# Altium PCB ALT-AVR-TESTER-MINI.PcbDoc
Units mm, origin at the board's own origin, x right, y up, seen from the top; angles counter-clockwise.
Board outline 79.88 x 35.94 mm, 3 copper layers (Top Layer, WIRES LAYER, Bottom Layer); 37 components, 35 nets, 126 pads, 12 vias.
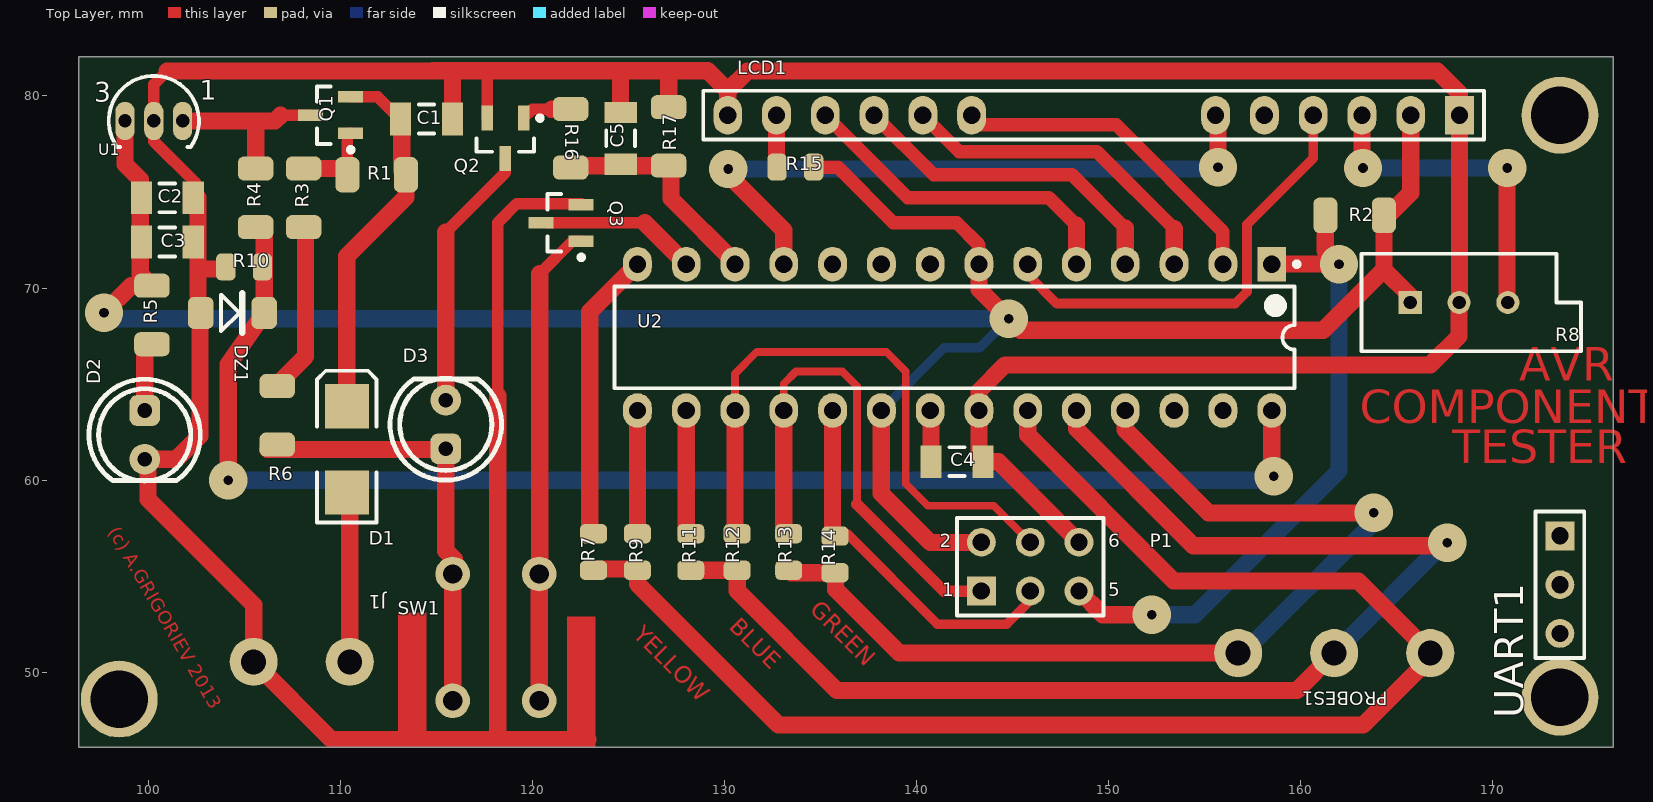
[diagram p0: Top Layer view]
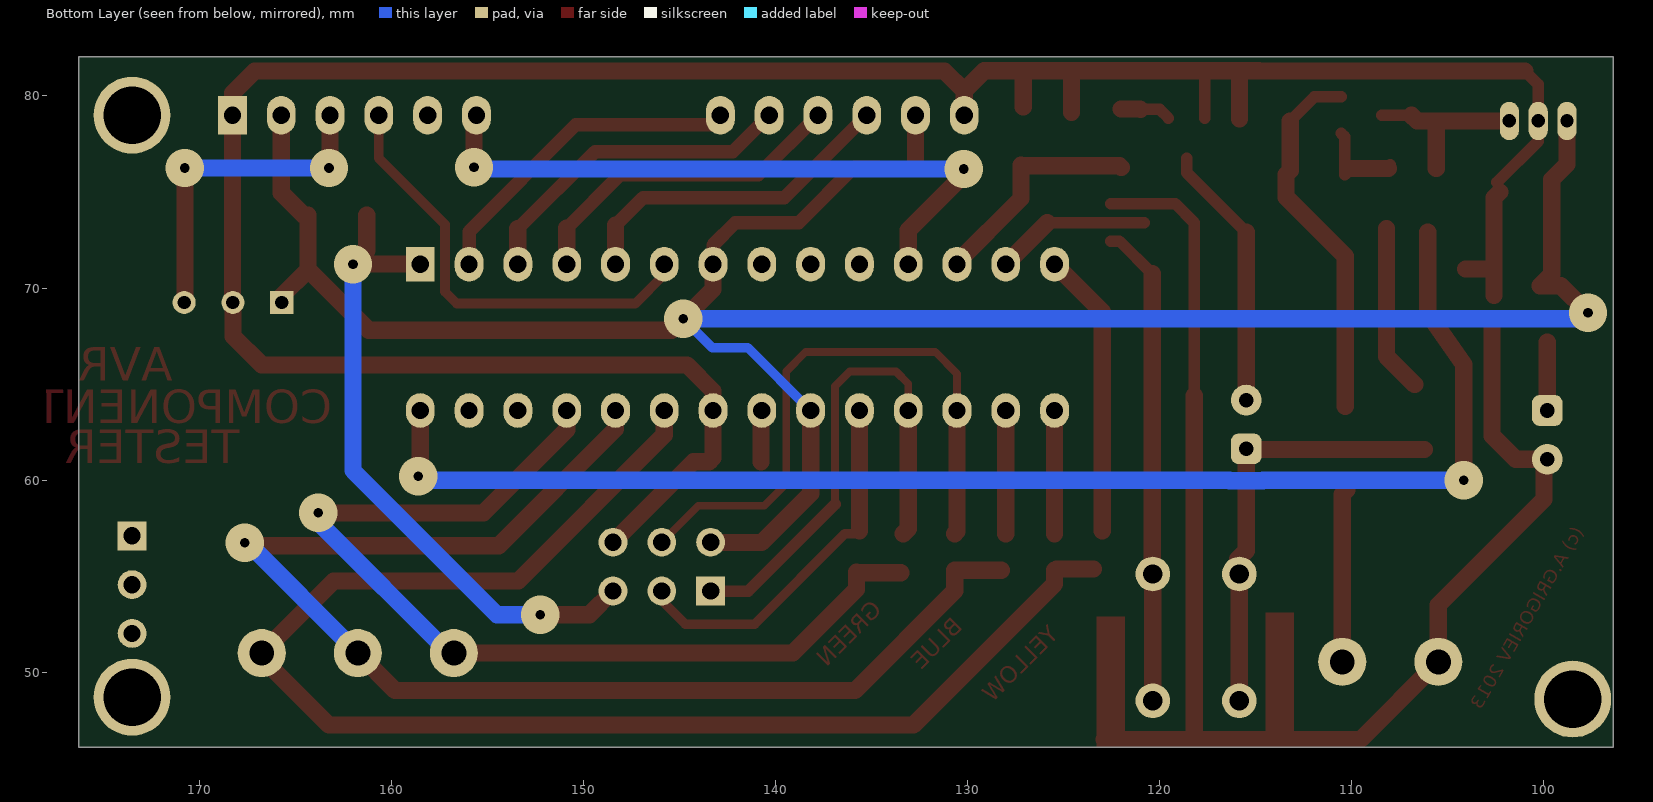
[diagram p1: Bottom Layer view, seen from below]
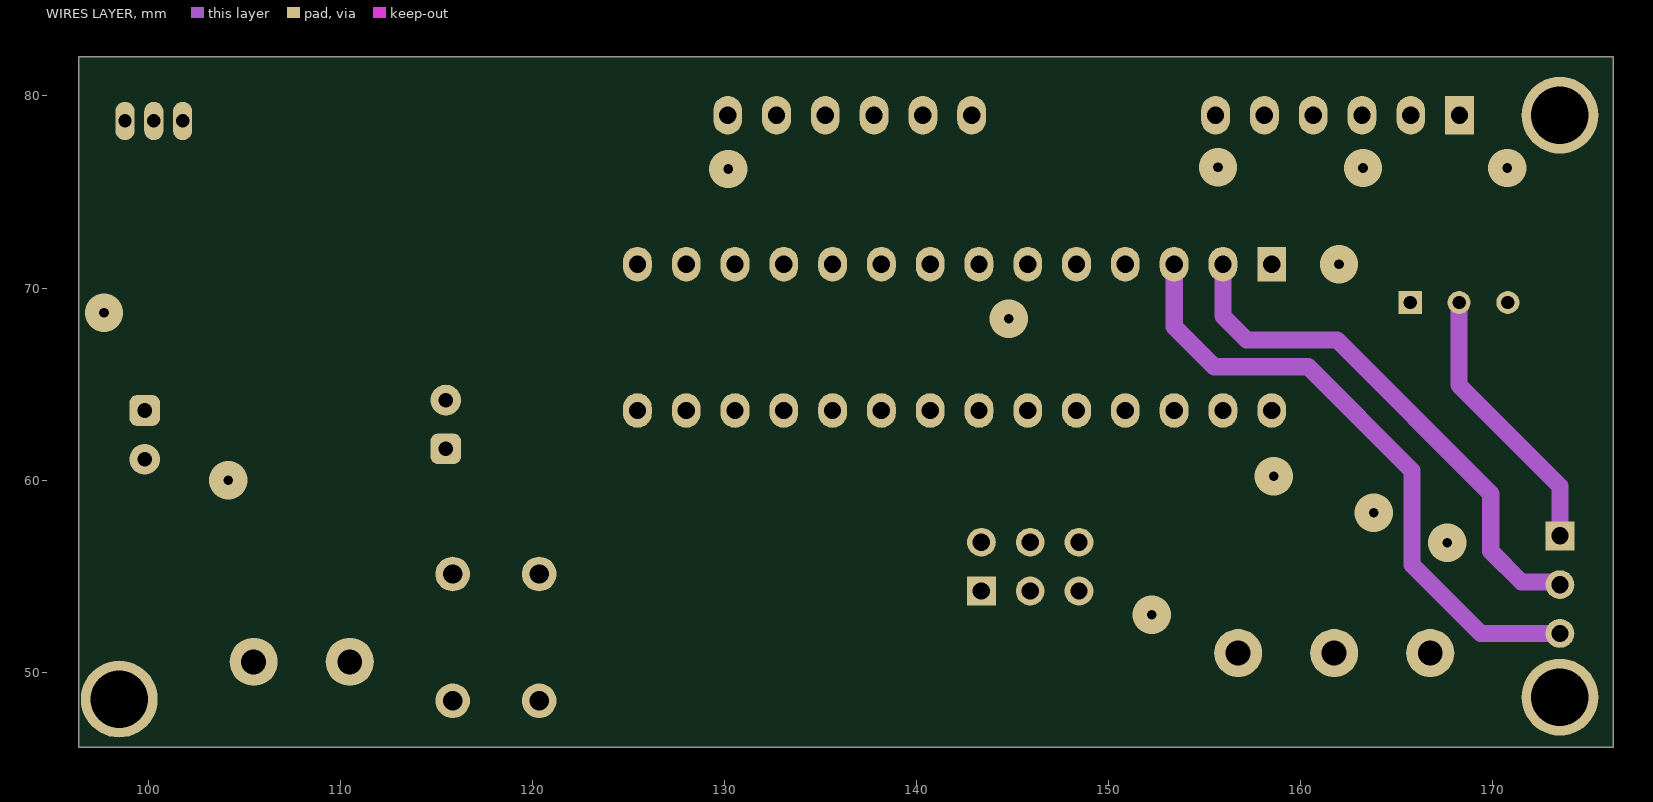
[diagram p2: WIRES LAYER]

## Layer stack, top to bottom
Top Layer: signal copper 0.0356
Dielectric: prepreg 0.32, FR-4, Dk 4.8
WIRES LAYER: signal copper 0.0356
Dielectric: core 0.32, FR-4, Dk 4.8
Bottom Layer: signal copper 0.0356

## Board outline
96.393,82.042 176.276,82.042 176.276,46.101 96.393,46.101 96.393,82.042

## Design rules (kind name [scope] priority, off if disabled: settings)
Clearance Clearance_Polygon [InPolygon] p1: gap=1.2
Clearance [All] p2: gap=0.254
HoleSize [All] p1: absolutevalues=TRUE maxlimit=4 minlimit=0.025 maxpercent=80.000 minpercent=20.000
PolygonConnect [All] p1: connectstyle=Relief reliefconductorwidth=0.254 reliefentries=4 polygonreliefangle="90 Angle" airgapwidth=0.254
RoutingVias [All] p1: holewidth=0.711 width=1.27 viastyle="Through Hole" minholewidth=0.5 minwidth=1.27 maxholewidth=0.711 maxwidth=3
SMDNeckDown [All] p1: percent=120.000
SilkToSilkClearance SilkToSilkClearance_TEXT [IsText] p1: silktosilkclearance=0.001
SilkToSilkClearance [All] p2: silktosilkclearance=0.125
SilkscreenOverComponentPads SilkscreenOverComponentPads_txt [IsText] p1: minsilkscreentomaskgap=-5
SilkscreenOverComponentPads [All] p2: minsilkscreentomaskgap=0.12
SolderMaskExpansion [All] p1: expansion=0.102
Width [All] p1: maxlimit=0.9 minlimit=0.4 preferedwidth=0.7
25 further rules are at their usual default settings.

## Components (designator, comment, footprint, x,y, rotation, side; value= is the part's Value field where it differs from the comment)
C1 "100nF" C1206 114.5,78.8 r180 top
C2 "100nF" C1206 101,74.7 r180 top
C3 "100nF" C1206 101,72.4 r180 top
C4 "100nF" C1206 142.113,60.96 r180 top
C5 "100nF" C1206 124.6,77.8 r270 top
D1 "D Schottky" SMB 110.35,61.6 r90 top
D2 "PWR LED" LED_254 99.822,62.357 r270 top
D3 "LED" LED_254 115.5,62.9 r90 top
DZ1 "BZV55C5V1" SOD80D 104.394,68.707 r270 top
J1 "POWER9V" TB2-5MM 108,50.546 r0 top
LCD1 "HD44780" HDR1X16 168.275,79 r180 top
P1 "ISP" HDR2X3 143.383,54.229 r0 top
PROBES1 "PROBES" TB3-5MM 161.75,51 r0 top
Q1 "MMBT3906" SOT23_N 109.5,79 r180 top
Q2 "PMBT3904" SOT23_N 118.6,77.8 r270 top
Q3 "PMBT3904" SOT23_N 121.5,73.4 r180 top
R1 "ERQF06" RC1206D 111.9,75.9 r270 top
R2 "ERQF06" RC1206D 162.814,73.787 r90 top
R3 "ERQF06" RC1206D 108.1,74.7 r0 top
R4 "10K" RC1206D 105.6,74.7 r180 top
R5 "ERQF06" RC1206D 100.2,68.6 r0 top
R6 "ERQF06" RC1206D 106.725,63.375 r0 top
R7 "750" R0805 123.19,56.261 r180 top
R8 "RPot" VR5 168.25,69.25 r0 top
R9 "500K" R0805 125.476,56.261 r180 top
R10 "3K3" R0805 105,71.1 r90 top
R11 "750" R0805 128.255,56.26 r180 top
R12 "500K" R0805 130.668,56.26 r180 top
R13 "750" R0805 133.35,56.261 r180 top
R14 "500K" R0805 135.763,56.134 r180 top
R15 "150" R0805 133.7,76.3 r90 top
R16 "ERQF06" RC1206D 122,77.8 r180 top
R17 "ERQF06" RC1206D 127.1,77.9 r180 top
SW1 "TP1101" "SW TP1101" 118.11,51.816 r90 top
U1 "µA7805CKC" TO-92 100.3,78.7 r270 top
U2 "ATmega328P-PU" 28P3 141.986,67.437 r270 top locked
UART1 "Header 3" HDR1X3 173.5,57.1 r270 top

## Footprints (in the part's own frame and the unit in brackets; to place one, negate y for a bottom-side part, rotate by r counter-clockwise, add the part's x,y. Pads: shape width x height; smd on the part's side, far side on the other; paste and mask are expansions set on the pad)
28P3 [mm] "DIP, 28-Leads, Row Spacing 7.62mm, Pitch 2.54mm, Body 34.67x7.3mm"
  rect 1.8x1.5 hole 0.9: 1(-3.81,16.51)
  oval 1.8x1.5 hole 0.9: 2(-3.81,13.97) 3(-3.81,11.43) 4(-3.81,8.89) 5(-3.81,6.35) 6(-3.81,3.81) 7(-3.81,1.27) 8(-3.81,-1.27) 9(-3.81,-3.81) 10(-3.81,-6.35) 11(-3.81,-8.89) 12(-3.81,-11.43) 13(-3.81,-13.97) 14(-3.81,-16.51) 15(3.81,-16.51) 16(3.81,-13.97) 17(3.81,-11.43) 18(3.81,-8.89) 19(3.81,-6.35) 20(3.81,-3.81) 21(3.81,-1.27) 22(3.81,1.27) 23(3.81,3.81) 24(3.81,6.35) 25(3.81,8.89) 26(3.81,11.43) 27(3.81,13.97) 28(3.81,16.51)
  silkscreen extent -3.93,-17.7 2.65,17.94, body extent -3.6,-17.65 3.6,17.65, height 4.58
C1206 [mm] "Chip Capacitor, Body 3.2x1.6mm, IPC High Density"
  rect 1.1x1.7 smd: 1(-1.35,0) 2(1.35,0)
  silkscreen extent -0.4,-0.75 0.4,0.75, body extent -1.7,-0.9 1.7,0.9, height 1.3
HDR1X3 [mm] "Connector; Header; 3 Position"
  rect 1.5x1.5 hole 0.9: 1(0,0)
  round 1.5 hole 0.9: 2(2.54,0) 3(5.08,0)
  silkscreen extent -1.27,-1.27 6.35,1.27
HDR1X16 [mm] "Connector; Header; 16 Position"
  rect 1.5x2 hole 0.9: 1(0,0)
  oval 1.5x2 hole 0.9: 2(2.54,0) 3(5.08,0) 4(7.62,0) 5(10.16,0) 6(12.7,0) 11(25.4,0) 12(27.94,0) 13(30.48,0) 14(33.02,0) 15(35.56,0) 16(38.1,0)
  silkscreen extent -1.27,-1.27 39.37,1.27
HDR2X3 [mm] "Connector; Header; 3x2 Position"
  rect 1.5x1.5 hole 0.9: 1(0,0)
  round 1.5 hole 0.9: 2(0,2.54) 3(2.54,0) 4(2.54,2.54) 5(5.08,0) 6(5.08,2.54)
  silkscreen extent -1.27,-1.27 6.35,3.81
LED_254 [mm]
  rrect50% 1.6x1.6 hole 0.762: 1(-1.27,0)
  round 1.6 hole 0.762: 2(1.27,0)
  silkscreen extent -2.9,-2.9 2.4,2.9
R0805 [mm]
  rrect50% 1.4x1 smd: 1(0,-0.953) 2(0,0.953)
  body extent -0.65,-1.1 0.65,1.1, height 0.6
RC1206D [mm]
  rrect50% 1.84x1.25 smd: 1(0,-1.524) 2(0,1.524)
  body extent -0.8,-1.6 0.8,1.6, height 0.5
SMB [mm] "DO-214-AA/SMB; 2 C-Bend Leads; Body 5.3 x 3.6 mm, inc. leads (LxW)"
  rect 2.3x2.3 smd: 1(-2.25,0) 2(2.25,0)
  silkscreen extent -3.8,-1.55 4.1,1.55
SOD80D [mm]
  rrect50% 1.68x1.34 smd: 1(0,-1.651) 2(0,1.651)
  silkscreen extent -1.02,-0.59 1.02,0.51, body extent -0.8,-1.75 0.8,1.75, height 1.6
SOT23_N [mm] "SOT23, 3-Leads, Body 2.9x1.3mm, Pitch 0.95mm, Lead Span 2.3mm, IPC Medium Density"
  rect 1.3x0.6 smd: 1(-1.05,0.95) 2(-1.05,-0.95) 3(1.05,0)
  silkscreen extent -1.18,-1.5 0.7,1.92, body extent -0.7,-1.5 0.7,1.5, height 1.1
"SW TP1101" [mm]
  round 1.8 hole 1: 1(-3.3,2.25) 2(-3.3,-2.25) 3(3.3,2.25) 4(3.3,-2.25)
  body extent -3.4,-3 3.4,3, height 4.3
TB2-5MM [mm]
  round 2.5 hole 1.3: 1(-2.5,0) 2(2.5,0)
  body extent -4.99,-3.3 4.99,4.2, height 10
TB3-5MM [mm]
  round 2.5 hole 1.3: 1(-5,0) 2(0,0) 3(5,0)
  body extent -7.49,-3.3 7.49,4.2, height 10
TO-92 [mm] "TO, Flat Index; 3 In-Line, Axial Leads; Body Dia. 4.6mm; Leads 0.41 x 0.39 mm (max)"
  oval 2x1 hole 0.7: 1(0,1.5) 2(0,0) 3(0,-1.5)
  silkscreen extent -2.34,-2.34 1.35,2.34
VR5 [mm] "Thru-Hole; 3 Leads"
  rect 1.2x1.2 hole 0.7: 1(-2.54,0)
  round 1.2 hole 0.7: 2(0,0) 3(2.54,0)
  silkscreen extent -5.08,-2.54 6.35,2.54

## Part data
C1 C2 C3 C4 C5: library part "CAP 0805 NP0", "SMD Конденсатор 0805 NP0 25V"
D1: "Schottky Diode"
D2: library part LED
DZ1: library part "DZ BZV55C5V1", "SMD SILICON ZENER DIODE 0.5 WATT ± 5% TOLERANCE"
J1: library part CON2
LCD1: library part MHDR1X16, "Header, 16-Pin"
P1: library part "Header 3X2H", "Header, 3-Pin, Dual row, Right Angle"
PROBES1: library part "CON TBN050-D10-03", "Клемник на плату прямой шаг5мм"
Q1: "PNP Switching Transistor"
Q2 Q3: "NPN Switching Transistor"
R1 R2 R3 R5 R6 R16 R17: "Flat Chip Fuse Resistor, 0.47 Ohm to 10 Ohm Range, 5% Tolerance, 0805 Size, 0.1 W"
R4 R7 R9 R10 R11 R12 R13 R14 R15: library part "RES 0805", "SMD Резистор 0805"
R8: "Potentiometer"
SW1: library part "SW TP1101", "Кнопка"
U1: "Positive-Voltage Regulator"
U2: "8-bit AVR Microcontroller, 32KB Flash, 1KB EEPROM, 2KB SRAM, 28-pin PDIP, Industrial Grade (-40°C to 85°C)"
UART1: "Header, 3-Pin"

## Free pads (board coordinates)
  round 4 hole 3: 0(98.5,48.6) 0(173.5,48.7) 0(173.5,79)

## Via types
v1: diameter 2, hole 0.5, Top Layer to Bottom Layer, 12 vias

## Nets (pads, with @x,y where several pads share a name; then routed paths per layer and width w, separated by ;. In a path a pad name is that pad's centre, name@x,y a point inside that pad or via, vN(x,y) a via of type N, cw(c..) or ccw(c..) an arc to the next point about the centre after c; other vN are vias at no path point)
BATTERY_PIN: DZ1.2 R4.2 R10.1 U2.28 | length 71.1
  Top Layer w0.9: v1(104.175,60) 104.175,66.025 DZ1.2 R4.2@106.045,72.9 ; v1@158.496,60.304 U2.28
  Bottom Layer w0.9: v1(104.175,60) 114.619,60 114.643,59.976 116.357,59.976 116.381,60 v1@158.4,60
  other v1: 158.6,60.2
BLUE_PROBES: PROBES1.2 R11.2 R12.2 U2.24 | length 68.8
  Top Layer w0.9: R11.2 R12.2 130.668,54.244 135.866,49.046 159.796,49.046 PROBES1.2 ; U2.24 148.336,62.664 154.408,56.592 167.482,56.592 v1(167.64,56.75)
  Bottom Layer w0.9: PROBES1.2 167.64,56.89 v1(167.64,56.75)
D4: LCD1.11 U2.2 UART1.2 | length 45.1
  Top Layer w0.7: LCD1.11 143.375,78.5 150.4,78.5 155.956,72.944 U2.2
  WIRES LAYER w0.9: U2.2 155.956,68.544 157.2,67.3 161.9,67.3 169.9,59.3 169.9,56.3 171.5,54.7 173.36,54.7 UART1.2
D5: LCD1.12 U2.3 UART1.3 | length 50.2
  Top Layer w0.7: LCD1.12 142.235,77.1 149.4,77.1 153.416,73.084
  Top Layer w0.9: U2.3 153.416,73.084
  WIRES LAYER w0.9: U2.3 153.416,67.984 155.5,65.9 160.4,65.9 165.8,60.5 165.8,55.6 169.38,52.02 UART1.3
D6: LCD1.13 U2.4 | length 17.4
  Top Layer w0.7: LCD1.13 140.895,75.9 148.1,75.9 150.876,73.124
  Top Layer w0.9: U2.4 150.876,73.124
D7: LCD1.14 U2.5 | length 17.5
  Top Layer w0.7: LCD1.14 139.555,74.7 146.9,74.7 148.336,73.264
  Top Layer w0.9: U2.5 148.336,73.264
E: LCD1.6 U2.11 | length 34.4
  Top Layer w0.9: v1(130.2,76.2) 130.2,75.9 133.096,73.004 U2.11 ; LCD1.6 155.7,78.875 v1(155.7,76.3)
  Bottom Layer w0.9: v1(130.2,76.2) 155.6,76.2 v1(155.7,76.3)
GND: C1.1 C2.1 C3.1 C4.1 C5.1 D2.2 DZ1.1 J1.1 LCD1.1 LCD1.16 P1.6 Q2.2 Q3.2 R8.2 R10.2 R17.1 U1.2 U2.22 UART1.1 | length 229.4
  Top Layer w0.6: 101,81.3 100.3,80.6 U1.2 100.3,77.65 C2.1@102.45,75.5 ; Q2.2 117.65,81.257 117.7,81.307 ; 118.2,64.4 118.2,73.4 119.2,74.4 Q3.2@122.55,74.4
  Top Layer w0.9: 101,81.3 114.85,81.3 ; C2.1@102.3,75 102.6,74.7 102.6,69.634 ; DZ1.1@102.7,68.257 102.7,62.314 101.473,61.087 D2.2 100,60.909 100,59 105.5,53.5 J1.1 109.546,46.5 118.2,46.5 ; 102.995,70.993 R10.2@104.076,70.993 ; 114.85,81.307 115.8,81.307 ; C1.1 115.85,81.257 115.8,81.307 ; 118.2,64.4 118.2,46.5 ; 122.9,46.5 118.2,46.5 ; C5.1 124.6,81.307 ; R17.1 127.1,81.207 127.2,81.307 ; LCD1.16 130.175,80.264 ; P1.6 144.272,60.96 C4.1 143.256,61.167 U2.22 143.256,64.643 144.613,66 166.75,66 168.25,67.5 R8.2 R8.2@168.25,69.5 ; R8.2@168.275,69.25 LCD1.1 168.275,80.137 167.112,81.3 131.211,81.3 130.175,80.264 ; 115.8,81.307 117.7,81.307 124.6,81.307 ; 124.6,81.307 127.2,81.307 ; 127.2,81.307 129.132,81.307 130.175,80.264
  WIRES LAYER w0.9: R8.2 168.25,64.95 173.5,59.7 UART1.1
GREEN_PROBES: PROBES1.1 R13.2 R14.2 U2.25 | length 51.8
  Top Layer w0.9: R13.2@133.477,55.181 R14.2 ; R14.2@135.791,55.209 135.791,54.321 139.111,51 PROBES1.1 ; U2.25 150.876,62.624 155.204,58.296 163.796,58.296 v1(163.8,58.3)
  Bottom Layer w0.9: PROBES1.1 157,51 163.7,57.7 163.7,58.4 v1@163.6,58.5
MISO: P1.1 R13.1 U2.18 | length 26.8
  Top Layer w0.4: U2.18 133.096,65.024 133.731,65.659 136.144,65.659 136.906,64.897 136.906,58.744
  Top Layer w0.6: 136.906,58.744 141.421,54.229 P1.1
  Top Layer w0.9: U2.18 133.096,57.468 R13.1
MOSI: P1.4 R12.1 U2.17 | length 31.7
  Top Layer w0.4: U2.17 130.556,65.532 131.699,66.675 138.43,66.675 139.446,65.659 139.446,59.817 140.589,58.674 144.018,58.674 P1.4
  Top Layer w0.9: U2.17 130.556,57.325 R12.1
NetC1_2: C1.2 D1.2 Q1.2 R1.2 | length 19.4
  Top Layer w0.6: Q1.2 111.95,79.95 C1.2@113.2,78.7
  Top Layer w0.9: D1.2@110.35,63.845 110.35,71.65 113.424,74.724 R1.2 113.2,76.124 C1.2@113.2,78.7
NetC4_2: C4.2 U2.21 | length 2.7
  Top Layer w0.4: U2.21 U2.21@140.763,63.58
  Top Layer w0.9: C4.2 U2.21@140.763,63.58
NetD1_1: D1.1 J1.2 | length 9.3
  Top Layer w0.9: D1.1@110.25,59.5 110.5,59.25 110.5,50.6 J1.2@110.7,50.4
NetD2_1: D2.1 R5.1 | length 3.6
  Top Layer w0.9: D2.1 R5.1@99.822,67.183
NetD3_1: D3.1 R6.1 SW1.1 SW1.3 | length 21.8
  Top Layer w0.9: R6.1@106.225,61.595 115.5,61.595 115.5,56.329 SW1.3@115.951,55.878 ; SW1.1 SW1.3
NetD3_2: D3.2 Q2.3 | length 14
  Top Layer w0.6: 115.5,72.9 118.6,76 Q2.3
  Top Layer w0.9: D3.2@115.5,64.02 115.5,72.9
NetLCD1_3: LCD1.3 R8.3 | length 17.3
  Top Layer w0.9: LCD1.3 163.195,76.305 v1(163.25,76.25) ; v1(170.75,76.25) 170.75,69.29 R8.3
  Bottom Layer w0.9: v1(163.25,76.25) v1(170.75,76.25)
NetLCD1_15: LCD1.15 R15.2 | length 3.1
  Top Layer w0.9: R15.2@132.715,76.533 LCD1.15 LCD1.15@132.715,78.415
NetQ1_1: Q1.1 R1.1 R3.2 | length 4.7
  Top Layer w0.6: R3.2@108.012,76.312 R3.2@108.012,76.412 ; R1.1@110.052,76.224 R1.1 110.376,77.876 Q1.1
  Top Layer w0.9: R3.2 R1.1@110.052,76.224
NetQ1_3: Q1.3 R4.1 U1.1 | length 9.3
  Top Layer w0.6: 106.9,79 Q1.3
  Top Layer w0.9: U1.1 105.5,78.7 ; 105.4,78.7 106.6,78.7 106.9,79 ; R4.1 105.6,78.6
NetQ2_1: Q2.1 R16.1 | length 2.6
  Top Layer w0.6: Q2.1 120,79.3 121,79.3
  Top Layer w0.9: 121,79.3 121.024,79.324 R16.1
NetQ3_1: Q3.1 SW1.2 SW1.4 | length 24.3
  Top Layer w0.6: 120.396,70.746 122.1,72.45 Q3.1
  Top Layer w0.9: SW1.2 SW1.4 ; SW1.4@120.396,55.878 120.396,70.746
NetR3_1: R3.1 R6.2 | length 8.7
  Top Layer w0.9: R6.2@106.724,64.975 108.2,66.452 R3.1@108.2,73.101
NetR7_1: R7.1 U2.14 | length 14.9
  Top Layer w0.9: R7.1@123,57.361 123,68.771 U2.14
NetR9_1: R9.1 U2.15 | length 6.4
  Top Layer w0.9: R9.1 U2.15
NetR11_1: R11.1 U2.16 | length 6.4
  Top Layer w0.9: R11.1@128.016,57.212 U2.16
ON_PIN: C5.2 R16.2 R17.2 U2.12 | length 11.7
  Top Layer w0.6: U2.12 U2.12@130.6,71.291
  Top Layer w0.9: R16.2 122.1,76.376 R17.2 ; R17.2@127.227,76.4 127.227,74.664 U2.12@130.6,71.291
RESET_PIN: Q3.3 U2.13 | length 8.1
  Top Layer w0.6: Q3.3@120.8,73.4 125.863,73.4
  Top Layer w0.9: 125.863,73.4 U2.13
REST: P1.5 R2.2 U2.1 | length 34.3
  Top Layer w0.9: P1.5 149.692,53 v1(152.25,53) ; U2.1 158.499,71.25 v1(162,71.25) 161.29,71.96 R2.2
  Bottom Layer w0.9: v1(152.25,53) 154.5,53 162,60.5 v1@162,71 ; v1(162,71.25) v1@162.25,71
RS: LCD1.4 U2.6 | length 23.4
  Top Layer w0.5: U2.6 145.796,70.704 147.3,69.2 156.6,69.2 157.21,69.81 157.21,73.31 160.655,76.755 LCD1.4
RW: LCD1.5
SCK: P1.3 R14.1 U2.19 | length 19.5
  Top Layer w0.5: R14.1@135.636,57.213 136.386,57.213 141.1,52.5 144.7,52.5 145.923,53.723 P1.3
  Top Layer w0.9: R14.1@135.636,57.361 U2.19
VCC: C2.2 C3.2 LCD1.2 P1.2 R2.1 R5.2 R8.1 R15.1 U1.3 U2.7 U2.20 | length 125.4
  Top Layer w0.7: R15.1 135.9,76.3 138.8,73.4 142.1,73.4 143.256,72.244 U2.7
  Top Layer w0.9: v1(97.707,68.707) 99.124,70.124 R5.2 99.6,70.724 99.6,75.65 98.8,76.45 98.8,76.73 U1.3 ; U2.20 138.176,59.309 140.735,56.75 143.237,56.75 P1.2@143.383,56.896 ; U2.7 143.256,69.944 145.4,67.8 161.175,67.8 164.338,70.963 ; R2.1 164.338,70.963 ; R2.1@164.567,73.787 165.735,74.955 LCD1.2 ; R8.1 165.71,69.591 164.338,70.963
  Bottom Layer w0.5: U2.20 141.449,66.9 143.3,66.9 v1(144.8,68.4)
  Bottom Layer w0.9: v1(97.707,68.707) 98.014,68.4 v1(144.8,68.4)
YELLOW_PROBES: PROBES1.3 R7.2 R9.2 U2.23 | length 75.7
  Top Layer w0.9: R7.2@123.453,55.372 R9.2@125.36,55.372 ; R9.2 125.476,54.61 132.836,47.25 163.25,47.25 166.875,50.875 163,54.75 153.403,54.75 145.796,62.357 U2.23
pads on no net: U2.8 U2.9 U2.10 U2.26 U2.27

## Other copper
Top Layer:
  rectangle net GND: 113,46.3 114.5,53.1
  rectangle net GND: 121.8,46.101 123.3,52.901
  text "AVR" at 171.377,64.6 h3
  text "COMPONENT" at 163.079,62.4 h3
  text "TESTER" at 167.9,60.3 h3
  text "(c) A.GRIGORIEV 2013" at 97.7,57.2 h1.2 r300
  text "GREEN" at 134.2,53 h1.5 r315
  text "BLUE" at 130,52.1 h1.5 r315
  text "YELLOW" at 125,51.7 h1.5 r315

## Silkscreen, mask and mechanical layers (free items; w line width, h text height)
Mechanical 1:
  lines w1: 96.393,46.807 96.393,82.042
  lines w1.2: 96.393,46.807 97.099,46.101 175.101,46.101 176.276,47.276 176.276,82.042 96.393,82.042

## Text inside footprints (layer, text, board x,y; h text height)
P1: Top Overlay "6" at 149.987,56.261 h1.2; Top Overlay "5" at 149.987,53.721 h1.2; Top Overlay "2" at 141.224,56.261 h1.2; Top Overlay "1" at 141.351,53.721 h1.2
U1: Top Overlay "3" at 97.2,79.7 h1; Top Overlay "1" at 102.7,79.8 h1